# EAGLE board Magic Panel I2C Interface (EAGLE 6.5.0)
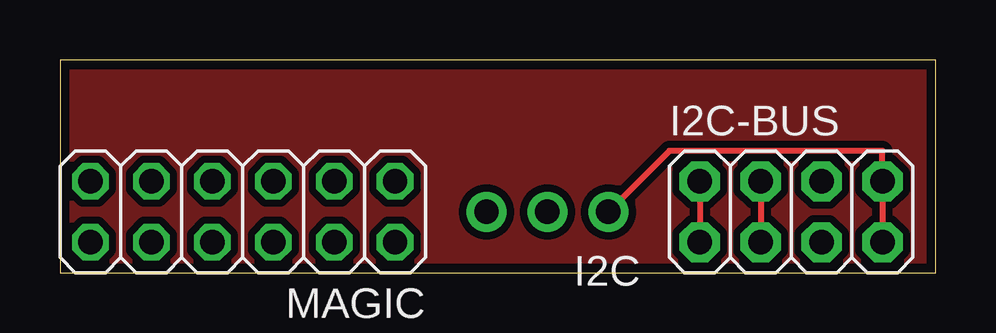
[diagram p0: board, top side]
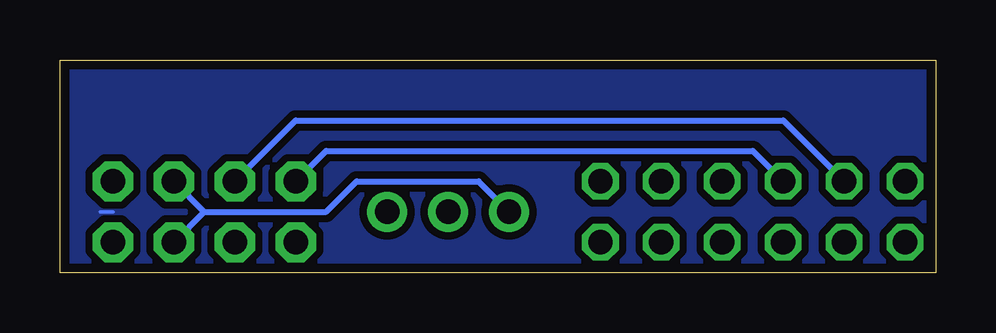
[diagram p1: board, bottom side, seen from below]

Size 36.5 x 8.88 mm. Coordinates in mm from the lower left corner, seen from the top.
Outline: 0,0 36.5,0 36.5,8.88 0,8.88 0,0
Copper layers (1*16): Top 0.0356mm / dielectric 1.5011mm / Bottom 0.0356mm
Design rules "LaenPCBOrder": minimum track width 6mil, minimum drill 13mil, track to track 6mil, track to pad 6mil, pad to pad 6mil, via to via 6mil, smd to smd 6mil, copper to edge 15mil, drill to drill 6mil, minimum pad ring 7mil, minimum via ring 7mil, stop-mask expansion 3mil, vias tented up to drill 0mil, thermal gap 10mil

## Footprints (pad centres in the part's own frame; a part is rotated, then mirrored left to right if it is on the bottom)
1X03-CLEANBIG = drill 1.016 pad 1.676: 1 -2.54,0; 2 0,0; 3 2.54,0
2X04 = drill 1.016 pad 1.676 octagon: 1 -3.81,-1.27; 2 -3.81,1.27; 3 -1.27,-1.27; 4 -1.27,1.27; 5 1.27,-1.27; 6 1.27,1.27; 7 3.81,-1.27; 8 3.81,1.27
2X06 = drill 1.016 octagon: 1 -6.35,-1.27; 2 -6.35,1.27; 3 -3.81,-1.27; 4 -3.81,1.27; 5 -1.27,-1.27; 6 -1.27,1.27; 7 1.27,-1.27; 8 1.27,1.27; 9 3.81,-1.27; 10 3.81,1.27; 11 6.35,-1.27; 12 6.35,1.27

## Placement (x,y rotation side)
I2C  [1X03-CLEANBIG]  20.32,2.54 180 top
I2C-BUS  [2X04]  30.48,2.54 0 top
MAGIC  [2X06]  7.62,2.54 180 top

## Library data of the parts
I2C I2C-BUS = adafruit
MAGIC = pinhead

## Nets
+5V: I2C-BUS.1 I2C-BUS.2 MAGIC.7
GND: I2C-BUS.3 I2C-BUS.4 MAGIC.9
SCL: I2C-BUS.5 I2C-BUS.6 I2C.3
SDA: I2C-BUS.7 I2C-BUS.8 I2C.1

## Tracks (layer width: path | path; a pad name or v marks a point on that pad's centre or on a via)
+5V
  Top 0.254: I2C-BUS.2 I2C-BUS.1
  Bottom 0.254: MAGIC.7 7.62,5.08 25.4,5.08 I2C-BUS.2
GND
  Top 0.254: I2C-BUS.4 I2C-BUS.3
  Bottom 0.254: MAGIC.9 6.35,6.35 26.67,6.35 I2C-BUS.4
N$1
  Top 0.152: 27.94,1.27 27.94,1.8 | 27.94,3.81
  pour Top (isolate 0.305): 0,8.89 36.45,8.89 36.45,0 0,0
N$2
  Bottom 0.152: 34.29,2.54 34.82,2.54
  pour Bottom (isolate 0.305): 0,8.89 36.45,8.89 36.45,0 0,0
SCL
  Bottom 0.254: I2C.3 19.05,3.81 24.13,3.81 25.4,2.54 30.48,2.54 | I2C-BUS.6 30.48,2.54 | 30.48,2.54 I2C-BUS.5
SDA
  Top 0.254: I2C.1 25.4,5.08 34.29,5.08 I2C-BUS.8 I2C-BUS.7